# EAGLE board rgb_sensor (EAGLE 6.6.0)
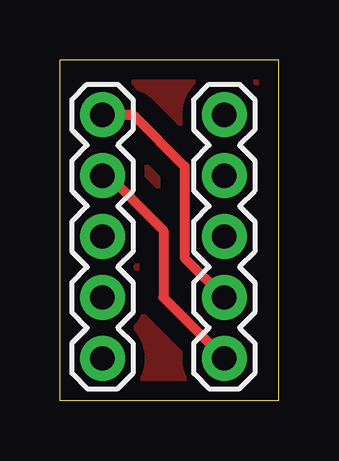
[diagram p0: board, top side]
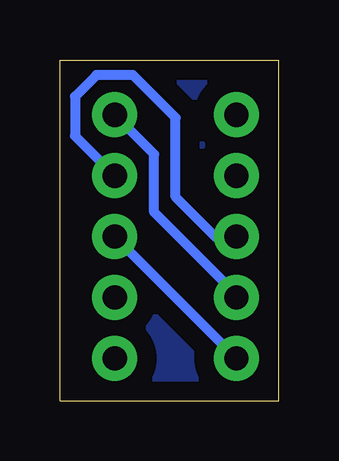
[diagram p1: board, bottom side, seen from below]

Size 9.14 x 14.22 mm. Coordinates in mm from the lower left corner, seen from the top.
Outline: 9.14,0 0,0 0,14.22 9.14,14.22 9.14,0
Copper layers (1*16): Top 0.035559375mm / dielectric 1.501140625mm / Bottom 0.035559375mm
Design rules "lpkf-strict": minimum track width 4mil, minimum drill 0.39878125mm, track to track 4mil, track to pad 4mil, pad to pad 4mil, via to via 8mil, smd to smd 4mil, copper to edge 8mil, drill to drill 8mil, minimum pad ring 10mil, minimum via ring 8mil, stop-mask expansion 4mil, vias tented up to drill 0mil, thermal gap 10mil

## Footprints (pad centres in the part's own frame; a part is rotated, then mirrored left to right if it is on the bottom)
1X05 = drill 1.016 pad 1.88: 1 0,0; 2 2.54,0; 3 5.08,0; 4 7.62,0; 5 10.16,0

## Placement (x,y rotation side)
BREAKOUT  [1X05]  1.78,1.78 90 top
TEENSY  [1X05]  6.86,1.78 90 top

## Library data of the parts
BREAKOUT TEENSY = SparkFun-Connectors

## Nets
3V3: BREAKOUT.4 TEENSY.1
GND: BREAKOUT.5 TEENSY.2
INT: BREAKOUT.1 TEENSY.3
SCL: BREAKOUT.2 TEENSY.5
SDA: BREAKOUT.3 TEENSY.4

## Tracks (layer width: path | path; a pad name or v marks a point on that pad's centre or on a via)
3V3
  Top 0.406: BREAKOUT.4 2.03,9.4 4.32,7.11 4.32,4.32 TEENSY.1
GND
  Top 0.406: BREAKOUT.5 3.05,11.94 5.21,9.78 5.21,5.97 TEENSY.2
INT
  Bottom 0.406: BREAKOUT.1 TEENSY.3
N$1
  pour Bottom (isolate 0.813): 0,14.61 9.53,14.61 9.53,0 0,0
N$2
  pour Top (isolate 0.813): 0,14.61 9.53,14.61 9.53,0 0,0
SCL
  Bottom 0.406: BREAKOUT.2 1.78,4.45 5.21,7.87 5.21,10.29 TEENSY.5
SDA
  Bottom 0.406: BREAKOUT.3 2.67,6.86 4.32,8.51 4.32,11.81 6.1,13.59 7.62,13.59 8.51,12.7 8.51,11.05 TEENSY.4